# Altium PCB main_Bord.PcbDoc
Units mil, origin at the board's own origin, x right, y up, seen from the top; angles counter-clockwise.
Board outline 6594.49 x 6472.05 mil, 2 copper layers (Top Layer, Bottom Layer), stack 61.855 mil thick; 94 components, 65 nets, 189 pads, 38 vias.
Unrouted connection lines stored in the file: 1.
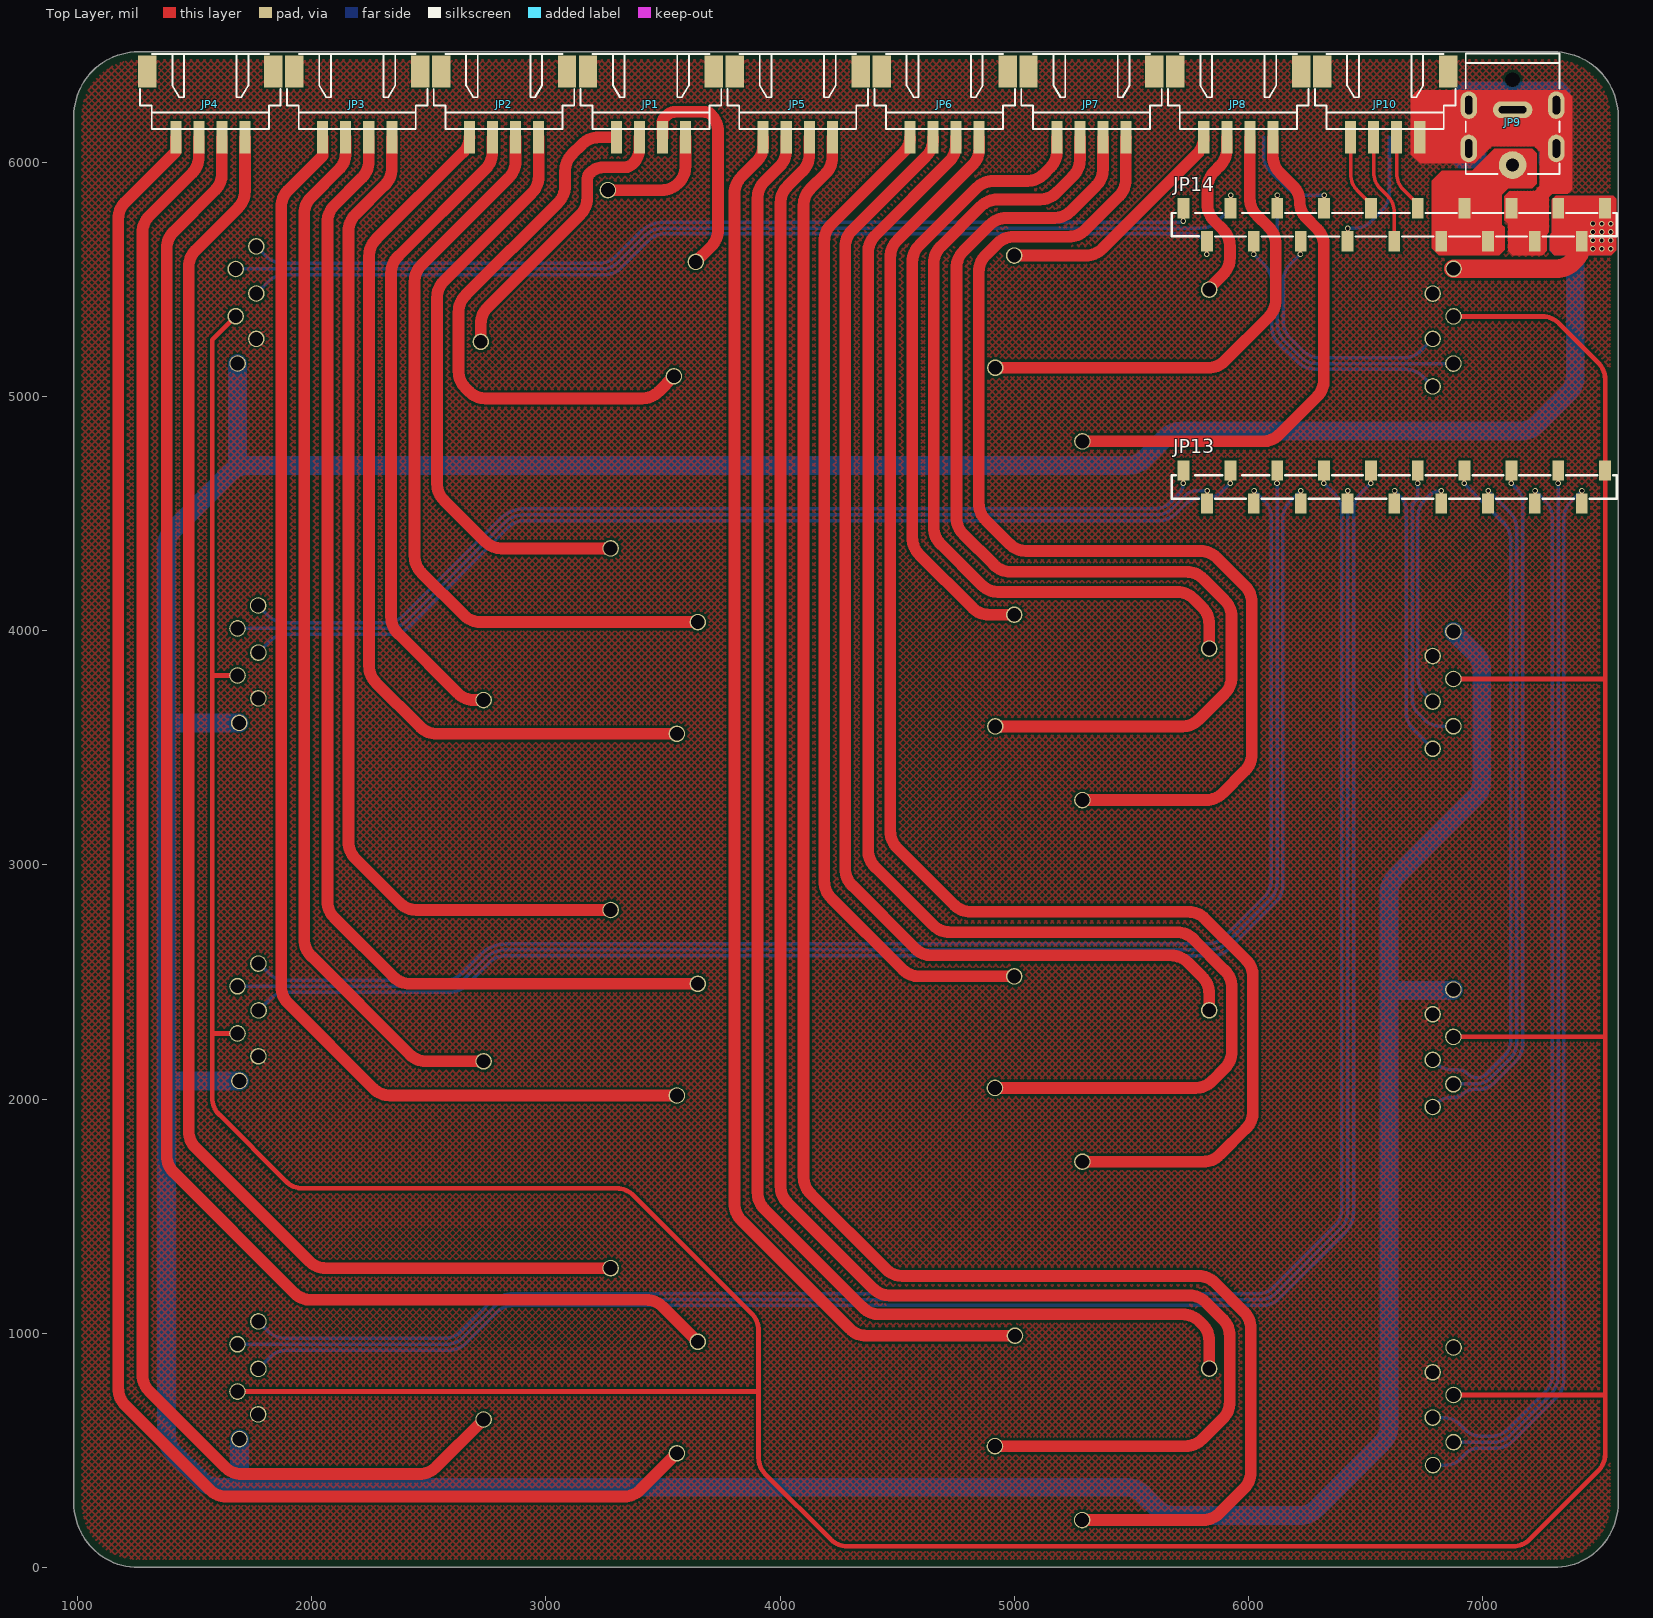
[diagram p0: Top Layer view]
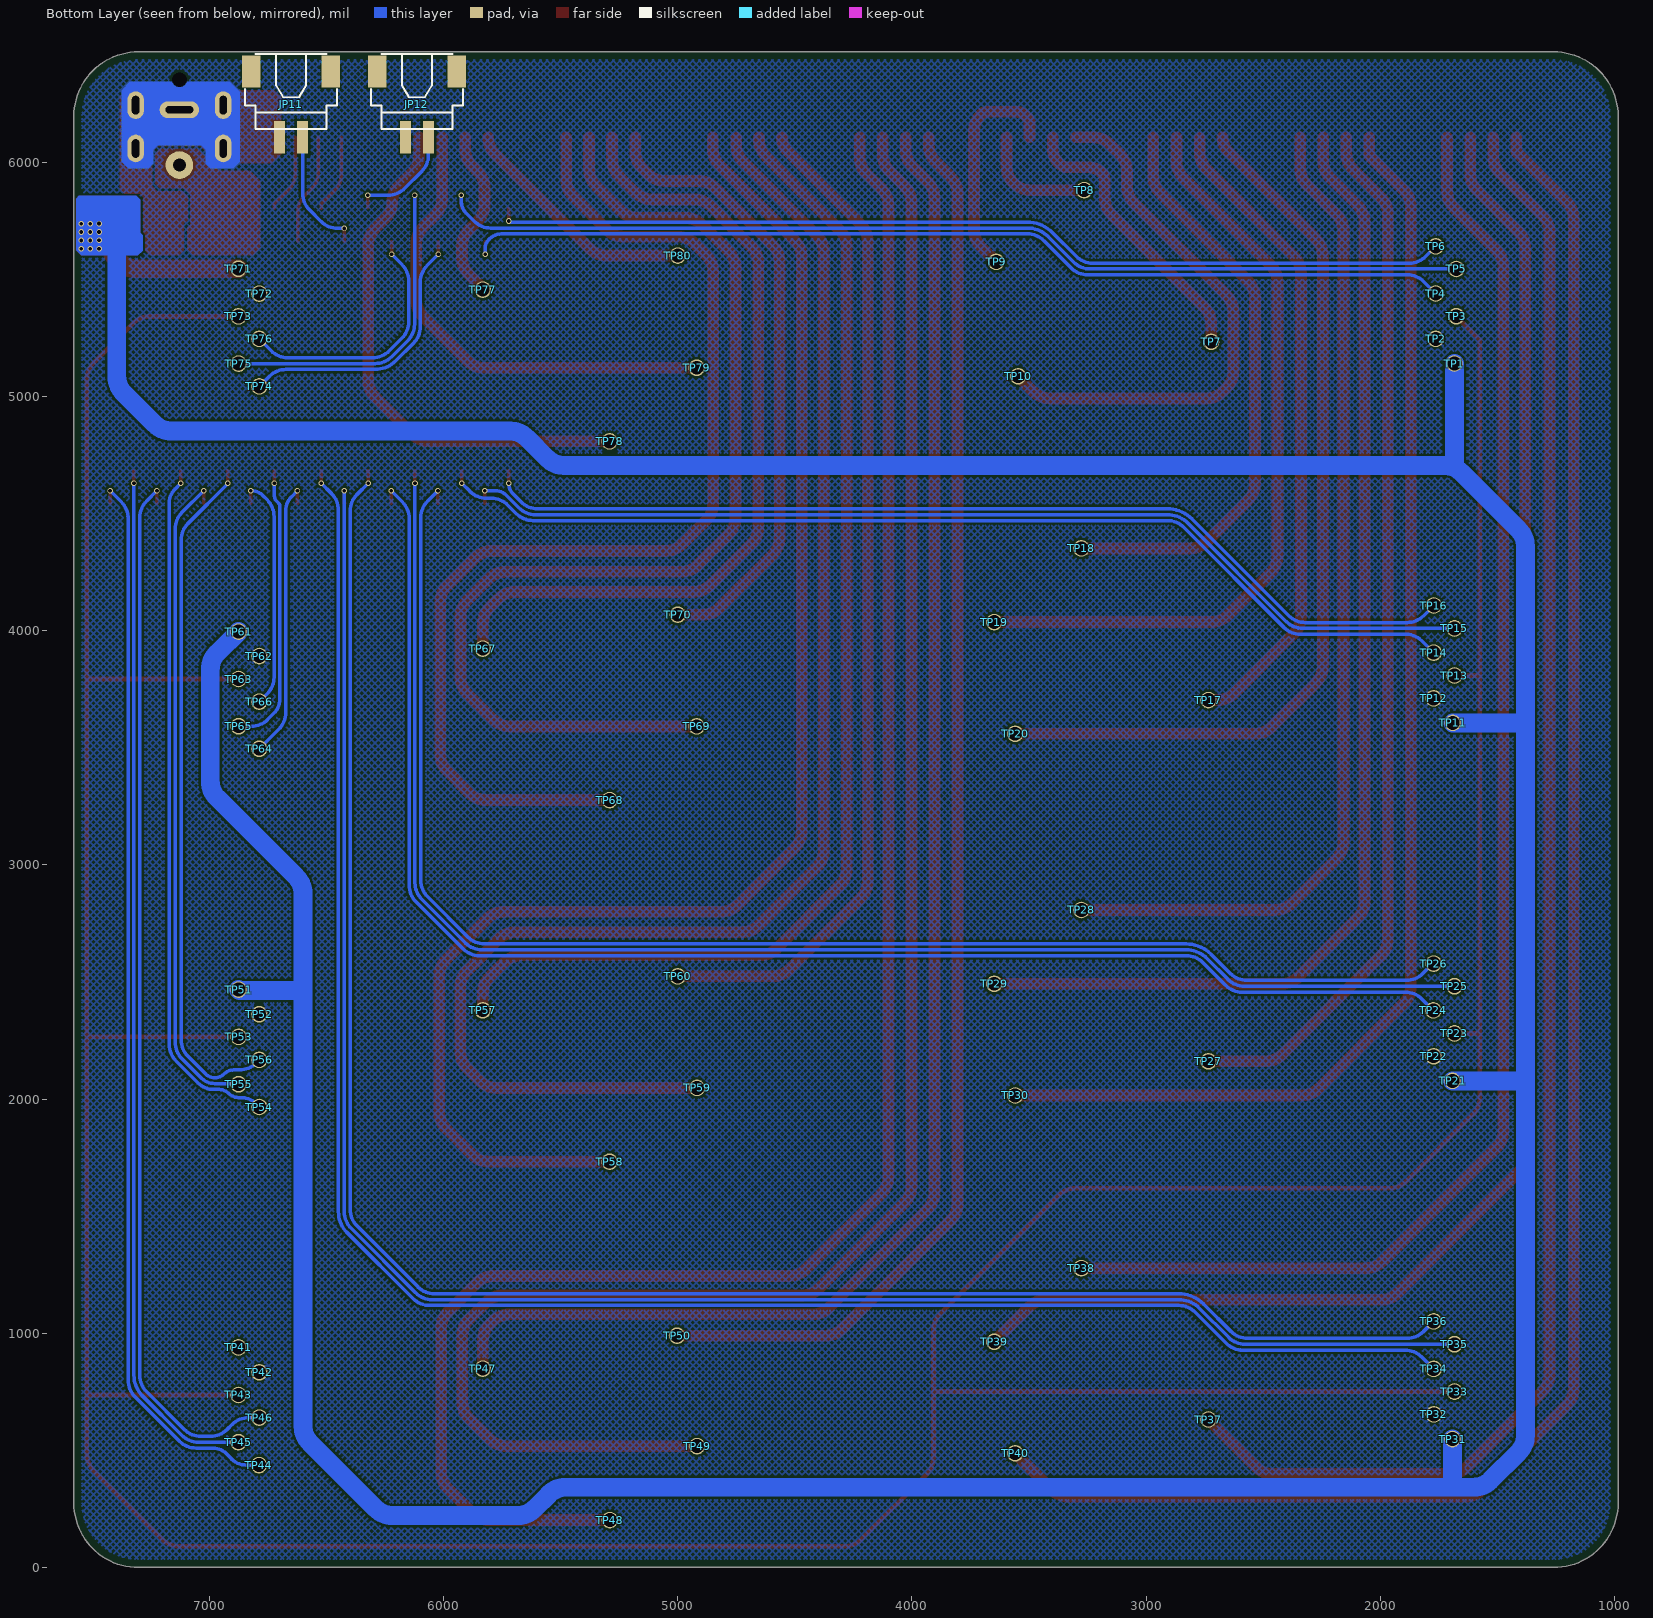
[diagram p1: Bottom Layer view, seen from below]

## Layer stack, top to bottom
Top Solder: solder mask 0.4, Solder Resist, Dk 3.5
Top Layer: signal copper 1.4
Dielectric 1: dielectric 59.0551, FR-4, Dk 4.8
Bottom Layer: signal copper 1.4
Bottom Solder: solder mask 0.4, Solder Resist, Dk 3.5

## Board outline
984.25,275.84 984.25,6196.71 cw(c1259.84,6196.71) 1259.84,6472.3 7303.15,6472.3 cw(c7303.15,6196.71) 7578.74,6196.71 7578.74,275.84 cw(c7303.15,275.84) 7303.15,0.25 1259.84,0.25 cw(c1259.84,275.84)

## Design rules (kind name [scope] priority, off if disabled: settings)
BoardOutlineClearance [All] p1: gap=30 ignorepadtopadclearanceinfootprint=FALSE
Clearance [All] p1: gap=10 ignorepadtopadclearanceinfootprint=FALSE except(0: Arc-Hole Track-Hole SMDPad-Hole THPad-Hole Via-Hole Fill-Hole Poly-Hole Region-Hole Text-Hole)
PolygonConnect [All] p1: connectstyle=Relief reliefconductorwidth=10 reliefentries=4 polygonreliefangle="45 Angle" airgapwidth=6
RoutingVias [All] p1: holewidth=28 width=23.62 viastyle="Through Hole" minholewidth=11.81 minwidth=15.75 maxholewidth=15.75 maxwidth=393.7
SilkToSolderMaskClearance [IsPad] p1: minsilkscreentomaskgap=0 clearancetoexposedcopper=TRUE
SolderMaskExpansion [All] p1: expansion=4 istentingtop=FALSE
Width [All] p1: maxlimit=100 minlimit=8 preferedwidth=10
29 further rules are at their usual default settings.

## Components (designator, comment, footprint, x,y, rotation, side; value= is the part's Value field where it differs from the comment)
JP1 "HDR-1X4" XH2.54-WS-4P 3448.46,6303.35 r180 top
JP2 "HDR-1X4" XH2.54-WS-4P 2821.38,6303.35 r180 top
JP3 "HDR-1X4" XH2.54-WS-4P 2194.3,6303.35 r180 top
JP4 "HDR-1X4" XH2.54-WS-4P 1567.22,6303.35 r180 top
JP5 "HDR-1X4" XH2.54-WS-4P 4075.54,6303.35 r180 top
JP6 "HDR-1X4" XH2.54-WS-4P 4702.62,6303.35 r180 top
JP7 "HDR-1X4" XH2.54-WS-4P 5329.7,6303.35 r180 top
JP8 "HDR-1X4" XH2.54-WS-4P 5956.78,6303.35 r180 top
JP9 "HDR-1X2" DC-005P 7128,6205.36 r180 top
JP10 "HDR-1X4" XH2.54-WS-4P 6583.78,6303.35 r180 top
JP11 "HDR-1X2" XH2.54-WS-2P 6651.2,6303.35 r0 bottom
JP12 "HDR-1X2" XH2.54-WS-2P 6113.65,6303.35 r0 bottom
JP13 "HDR-1X19" 贴片排针2.54mm_交错_19P 7523,4685 r180 top
JP14 "HDR-1X19" 贴片排针2.54mm_交错_19P 7523,5805 r180 top
TP1 "P100_H2" P100_H2 1683.54,5141.43 r180 bottom
TP2 "P100_H2" P100_H2 1763.28,5246.5 r180 bottom
TP3 "P100_H2" P100_H2 1675.25,5343.25 r180 bottom
TP4 "P100_H2" P100_H2 1763.28,5440.36 r180 bottom
TP5 "P100_H2" P100_H2 1675.25,5545.06 r180 bottom
TP6 "P100_H2" P100_H2 1763.28,5641.47 r180 bottom
TP7 "P100_H5" P100_H5 2722.06,5234.18 r180 bottom
TP8 "P100_H5" P100_H5 3264.71,5881.84 r180 bottom
TP9 "P100_H5" P100_H5 3640.22,5575.54 r180 bottom
TP10 "P100_H5" P100_H5 3546.63,5086.83 r90 bottom
TP11 "P100_H2" P100_H2 1690.26,3606.57 r180 bottom
TP12 "P100_H2" P100_H2 1772.14,3711.52 r90 bottom
TP13 "P100_H2" P100_H2 1683.13,3809.12 r90 bottom
TP14 "P100_H2" P100_H2 1772.14,3906.76 r90 bottom
TP15 "P100_H2" P100_H2 1683.13,4010.07 r90 bottom
TP16 "P100_H2" P100_H2 1771.15,4108.03 r90 bottom
TP17 "P100_H5" P100_H5 2733.87,3704.31 r90 bottom
TP18 "P100_H5" P100_H5 3276.53,4351.93 r90 bottom
TP19 "P100_H5" P100_H5 3648.55,4037.27 r90 bottom
TP20 "P100_H5" P100_H5 3559.2,3560.22 r90 bottom
TP21 "P100_H2" P100_H2 1691.42,2077.91 r90 bottom
TP22 "P100_H2" P100_H2 1772.14,2182.97 r90 bottom
TP23 "P100_H2" P100_H2 1683.13,2280.64 r90 bottom
TP24 "P100_H2" P100_H2 1773.26,2378.9 r90 bottom
TP25 "P100_H2" P100_H2 1683.13,2482.14 r90 bottom
TP26 "P100_H2" P100_H2 1772.14,2579.05 r90 bottom
TP27 "P100_H5" P100_H5 2733.87,2161.62 r90 bottom
TP28 "P100_H5" P100_H5 3276.53,2807.84 r90 bottom
TP29 "P100_H5" P100_H5 3648.55,2492.61 r90 bottom
TP30 "P100_H5" P100_H5 3559.2,2015.76 r90 bottom
TP31 "P100_H2" P100_H2 1691.42,548.69 r90 bottom
TP32 "P100_H2" P100_H2 1771.15,654.09 r90 bottom
TP33 "P100_H2" P100_H2 1683.13,751.54 r90 bottom
TP34 "P100_H2" P100_H2 1772.14,848.08 r90 bottom
TP35 "P100_H2" P100_H2 1683.13,953.43 r90 bottom
TP36 "P100_H2" P100_H2 1772.14,1050.87 r90 bottom
TP37 "P100_H5" P100_H5 2733.87,632.1 r90 bottom
TP38 "P100_H5" P100_H5 3276.53,1278.49 r90 bottom
TP39 "P100_H5" P100_H5 3648.55,964.19 r90 bottom
TP40 "P100_H5" P100_H5 3559.2,487.73 r90 bottom
TP41 "P100_H2" P100_H2 6875.88,939.75 r90 bottom
TP42 "P100_H2" P100_H2 6786.85,833.59 r90 bottom
TP43 "P100_H2" P100_H2 6875.88,736.83 r90 bottom
TP44 "P100_H2" P100_H2 6788.19,437.48 r90 bottom
TP45 "P100_H2" P100_H2 6875.88,535.13 r90 bottom
TP46 "P100_H2" P100_H2 6786.85,640.4 r90 bottom
TP47 "P100_H5" P100_H5 5832.35,849.49 r90 bottom
TP48 "P100_H5" P100_H5 5289.73,202.79 r90 bottom
TP49 "P100_H5" P100_H5 4917.61,518.53 r90 bottom
TP50 "P100_H5" P100_H5 5003,990 r90 bottom
TP51 "P100_H2" P100_H2 6875.3,2468.04 r90 bottom
TP52 "P100_H2" P100_H2 6786.85,2362.59 r90 bottom
TP53 "P100_H2" P100_H2 6875.3,2265.93 r90 bottom
TP54 "P100_H2" P100_H2 6786.85,1966.55 r90 bottom
TP55 "P100_H2" P100_H2 6875.3,2063.82 r90 bottom
TP56 "P100_H2" P100_H2 6786.85,2167.62 r90 bottom
TP57 "P100_H5" P100_H5 5832.35,2379.4 r90 bottom
TP58 "P100_H5" P100_H5 5291.05,1733.06 r90 bottom
TP59 "P100_H5" P100_H5 4917.61,2047.98 r90 bottom
TP60 "P100_H5" P100_H5 4999.74,2524.33 r90 bottom
TP61 "P100_H2" P100_H2 6875.3,3996.8 r90 bottom
TP62 "P100_H2" P100_H2 6786.85,3892.3 r90 bottom
TP63 "P100_H2" P100_H2 6875.3,3794.2 r90 bottom
TP64 "P100_H2" P100_H2 6786.85,3496.31 r90 bottom
TP65 "P100_H2" P100_H2 6875.3,3592.37 r90 bottom
TP66 "P100_H2" P100_H2 6786.85,3697.5 r90 bottom
TP67 "P100_H5" P100_H5 5832.35,3924 r90 bottom
TP68 "P100_H5" P100_H5 5291.05,3277.15 r90 bottom
TP69 "P100_H5" P100_H5 4919.16,3591.76 r90 bottom
TP70 "P100_H5" P100_H5 4999.74,4068.76 r90 bottom
TP71 "P100_H2" P100_H2 6875.88,5546.03 r90 bottom
TP72 "P100_H2" P100_H2 6786.85,5440.02 r90 bottom
TP73 "P100_H2" P100_H2 6875.88,5342.52 r90 bottom
TP74 "P100_H2" P100_H2 6786.85,5043.51 r90 bottom
TP75 "P100_H2" P100_H2 6875.3,5141.15 r90 bottom
TP76 "P100_H2" P100_H2 6786.85,5246.46 r90 bottom
TP77 "P100_H5" P100_H5 5832.35,5456.98 r90 bottom
TP78 "P100_H5" P100_H5 5291.05,4808.89 r90 bottom
TP79 "P100_H5" P100_H5 4919.16,5123.35 r90 bottom
TP80 "P100_H5" P100_H5 4999.74,5602.4 r90 bottom

## Footprints (in the part's own frame and the unit in brackets; to place one, negate y for a bottom-side part, rotate by r counter-clockwise, add the part's x,y. Pads: shape width x height; smd on the part's side, far side on the other; paste and mask are expansions set on the pad)
DC-005P [mm] "13mm*10mm*10mm(长*宽*高)"
  oval 1.8x3 hole 0.8 slot 2 at 90 deg unplated: 0(-4.75,3.7) 0(-4.75,-1) 0(4.75,3.7) 0(4.75,-1)
  round 3 hole 1.4 unplated: 1(0,5.5)
  oval 4.3x1.8 hole 0.8 slot 3 at 0 deg unplated: 2(0,-0.5)
  round 0 hole 1.6 unplated: 4(0,-3.75)
  silkscreen extent -5.08,-6.6 5.08,6.48, body extent -5,-6.5 5,6.3, height 10.15
P100_H2 [mm] "P100系列探针H2"
  round 1.8 hole 1.5: 1(0,0)
  body extent -0.75,-0.74 0.75,0.74, height 25
P100_H5 [mm] "P100系列探针H53"
  round 1.8 hole 1.5: 1(0,0)
  body extent -1.2,-1.19 1.2,1.19, height 25
XH2.54-WS-2P [mm] "长：10mm，宽：8mm，高：6.1mm"
  rect 2x3.5 smd: 0(-4.327,-2.15) 0(4.327,-2.15)
  rect 1.2x3.5 smd: 1(-1.25,4.981) 2(1.25,4.981)
  silkscreen extent -5,-4.06 5,4.06, body extent -5,-4 5,6.42, height 6.05
XH2.54-WS-4P [mm] "长：15mm，宽：8mm，高：6.1mm"
  rect 2x3.5 smd: 0(-6.827,-2.15) 0(6.827,-2.15)
  rect 1.2x3.5 smd: 1(-3.75,4.981) 2(-1.25,4.981) 3(1.25,4.981) 4(3.75,4.981)
  silkscreen extent -7.62,-4.06 7.62,4.06, body extent -7.5,-4 7.5,6.42, height 6.05
贴片排针2.54mm_交错_19P [mm] "交错贴片排针"
  rect 1.27x2.2 smd: 1(0,0) 2(2.54,3.6) 3(5.08,0) 4(7.62,3.6) 5(10.16,0) 6(12.7,3.6) 7(15.24,0) 8(17.78,3.6) 9(20.32,0) 10(22.86,3.6) 11(25.4,0) 12(27.94,3.6) 13(30.48,0) 14(33.02,3.6) 15(35.56,0) 16(38.1,3.6) 17(40.64,0) 18(43.18,3.6) 19(45.72,0) ""(35.56,0)
  silkscreen extent -1.27,0.53 46.99,3.07, body extent -1.24,-0.58 39.41,4.22, height 9.16

## Part data
JP1 JP2 JP3 JP4 JP5 JP6 JP7 JP8 JP10: library part "Header 4", "4P接插件", BOM名称=4P接插件, 学习资源=www.ooocke.com, 版权归属=源创客
JP9 JP11 JP12: library part "Header 2", "2P接插件", BOM名称=2P接插件, 学习资源=www.ooocke.com, 版权归属=源创客
JP13 JP14: library part "Header 19", "19P接插件", BOM名称=19P接插件, 学习资源=www.ooocke.com, 版权归属=源创客
TP1 TP2 TP3 TP4 TP5 TP6 TP7 TP8 TP9 TP10 TP11 TP12 TP13 TP14 TP15 TP16 TP17 TP18 TP19 TP20 TP21 TP22 TP23 TP24 TP25 TP26 TP27 TP28 TP29 TP30 TP31 TP32 TP33 TP34 TP35 TP36 TP37 TP38 TP39 TP40 TP41 TP42 TP43 TP44 TP45 TP46 TP47 TP48 TP49 TP50 TP51 TP52 TP53 TP54 TP55 TP56 TP57 TP58 TP59 TP60 TP61 TP62 TP63 TP64 TP65 TP66 TP67 TP68 TP69 TP70 TP71 TP72 TP73 TP74 TP75 TP76 TP77 TP78 TP79 TP80: library part TEST, "测试点", BOM名称=测试点, 学习资源=www.ooocke.com, 版权归属=源创客

## Via types
v1: diameter 23.62, hole 15.75, Top Layer to Bottom Layer, 38 vias

## Nets (pads, with @x,y where several pads share a name; then routed paths per layer and width w, separated by ;. In a path a pad name is that pad's centre, name@x,y a point inside that pad or via, vN(x,y) a via of type N, cw(c..) or ccw(c..) an arc to the next point about the centre after c; other vN are vias at no path point)
Buttom: JP11.1 JP14.12 | length 548.3
  Top Layer w15: JP14.12@6423,5664.52 6424,5665.52 6424,5716.26 v1@6423,5717.26
  Bottom Layer w15: v1(6424,5718.26) 6451.84,5718.26 ccw(c6451.84,5818.26) 6522.55,5747.55 6572.7,5797.7 ccw(c6501.99,5868.41) 6601.99,5868.41 JP11.1
FAN1_ID1_STC: JP14.18 TP4.1 | length 4263.2
  Top Layer w15: v1@5823,5609.26 5822,5610.26 5822,5661 JP14.18@5823,5662
  Bottom Layer w15: TP4.1 1813.7,5490.78 cw(c1884.41,5420.06) 1884.41,5520.06 3249,5520.06 ccw(c3249,5620.06) 3319.71,5549.35 3436.07,5665.71 cw(c3506.78,5595) 3506.78,5695 5753.72,5695 cw(c5753.72,5626.72) 5802,5675 5808.31,5668.69 cw(c5775.24,5635.63) 5822,5635.63 v1(5822,5608.26)
FAN1_ID2_STC: JP14.17 TP5.1 | length 4448.6
  Top Layer w15: JP14.17@5923,5806.26 5924,5807.26 5924,5858 v1@5923,5859
  Bottom Layer w15: TP5.1 3238.64,5545.06 ccw(c3238.64,5645.06) 3309.35,5574.35 3418.42,5683.42 cw(c3506.78,5595) 3506.78,5720 5798.58,5720 ccw(c5798.58,5820) 5869.29,5749.29 5903.76,5783.76 ccw(c5854.89,5832.63) 5924,5832.63 v1(5924,5860)
FAN1_ID3_STC: JP14.19 TP6.1 | length 4100.6
  Top Layer w15: v1@5723,5751 5722,5752 5722,5802.74 JP14.19@5723,5803.74
  Bottom Layer w15: TP6.1 1805.4,5599.35 ccw(c1876.11,5670.06) 1876.11,5570.06 3228.29,5570.06 ccw(c3228.29,5670.06) 3299,5599.35 3400.71,5701.07 cw(c3506.78,5595) 3400.77,5701.13 cw(c3506.78,5595) 3506.78,5745 5709.93,5745 ccw(c5709.93,5762.07) 5715.66,5745.99 ccw(c5709.93,5762.07) v1(5722,5750)
FAN2_ID1_STC: JP13.17 TP14.1 | length 4477.4
  Top Layer w15: v1@5923,4631 5922,4632 5922,4682.74 JP13.17@5923,4683.74
  Bottom Layer w15: TP14.1 1822.69,3957.31 cw(c1889.72,3890.28) 1889.72,3985.07 2340.62,3985.07 ccw(c2340.62,4085.07) 2411.33,4014.36 2838.68,4441.71 cw(c2909.39,4371) 2909.39,4471 5618.29,4471 ccw(c5618.29,4571) 5689,4500.29 5725.42,4536.71 cw(c5796.13,4466) 5796.13,4566 5816.58,4566 ccw(c5816.58,4666) 5887.29,4595.29 v1(5922,4630)
FAN2_ID2_STC: JP13.18 TP15.1 | length 4421.3
  Top Layer w15: JP13.18@5823,4544.52 5824,4545.52 5824,4596.26 v1@5823,4597.26
  Bottom Layer w15: TP15.1 2330.27,4010.07 ccw(c2330.27,4110.07) 2400.98,4039.36 2821.04,4459.42 cw(c2909.39,4371) 2909.39,4496 5607.93,4496 ccw(c5607.93,4596) 5678.64,4525.29 5732.25,4578.9 cw(c5779,4532.15) 5779,4598.26 v1(5824,4598.26)
FAN2_ID3_STC: JP13.19 TP16.1 | length 4274.2
  Top Layer w15: v1@5723,4631 5722,4632 5722,4682.74 JP13.19@5723,4683.74
  Bottom Layer w15: TP16.1 1814.82,4064.36 ccw(c1885.53,4135.07) 1885.53,4035.07 2319.91,4035.07 ccw(c2319.91,4135.07) 2390.62,4064.36 2803.33,4477.07 cw(c2909.39,4371) 2803.39,4477.13 cw(c2909.39,4371) 2909.39,4521 5597.58,4521 ccw(c5597.58,4621) 5668.29,4550.29 5703.62,4585.62 ; 5703.64,4585.64 ccw(c5659.23,4630) v1(5722,4630)
FAN3_ID1_STC: JP13.14 TP24.1 | length 6363.7
  Top Layer w15: JP13.14@6223,4544.52 6224,4545.52 6224,4596.26 v1@6223,4597.26
  Bottom Layer w15: TP24.1 1822.21,2427.85 cw(c1892.92,2357.14) 1892.92,2457.14 2590.07,2457.14 ccw(c2590.07,2557.14) 2660.78,2486.43 2758.07,2583.71 cw(c2828.78,2513) 2828.78,2613 5846.29,2613 ccw(c5846.29,2713) 5917,2642.29 6117.71,2843 ccw(c6047,2913.71) 6147,2913.71 6147,4479.84 cw(c6247,4479.84) 6176.29,4550.55 v1(6224,4598.26)
FAN3_ID2_STC: JP13.15 TP25.1 | length 6387.4
  Top Layer w15: v1@6123,4631 6122,4632 6122,4682.74 JP13.15@6123,4683.74
  Bottom Layer w15: TP25.1 2579.72,2482.14 ccw(c2579.72,2582.14) 2650.43,2511.43 2740.42,2601.42 cw(c2828.78,2513) 2828.78,2638 5835.93,2638 ccw(c5835.93,2738) 5906.64,2667.29 6092.71,2853.36 ccw(c6022,2924.07) 6122,2924.07 v1(6122,4630)
FAN3_ID3_STC: JP13.16 TP26.1 | length 6275.6
  Top Layer w15: JP13.16@6023,4544.52 6024,4545.52 6024,4596.26 v1@6023,4597.26
  Bottom Layer w15: TP26.1 1775.76,2579.05 1818.38,2536.43 ccw(c1889.09,2607.14) 1889.09,2507.14 2569.36,2507.14 ccw(c2569.36,2607.14) 2640.07,2536.43 2722.71,2619.07 cw(c2828.78,2513) 2722.77,2619.13 cw(c2828.78,2513) 2828.78,2663 5825.58,2663 ccw(c5825.58,2763) 5896.29,2692.29 6067.71,2863.71 ccw(c5997,2934.42) 6097,2934.42 6097,4483.84 ccw(c5997,4483.84) 6067.71,4554.55 v1(6024,4598.26)
FAN4_ID1_STC: JP13.11 TP34.1 | length 8153
  Top Layer w15: v1@6523,4631 6522,4632 6522,4682.74 JP13.11@6523,4683.74
  Bottom Layer w15: TP34.1 1823.2,899.14 cw(c1893.91,828.43) 1893.91,928.43 2587.22,928.43 ccw(c2587.22,1028.43) 2657.94,957.72 2789.93,1089.71 cw(c2860.64,1019) 2860.64,1119 6059.29,1119 ccw(c6059.29,1219) 6130,1148.29 6412.42,1430.71 ccw(c6324,1519.07) 6449,1519.07 6449,4515.58 cw(c6549,4515.58) 6478.29,4586.29 v1(6522,4630)
FAN4_ID2_STC: JP13.12 TP35.1 | length 8113.9
  Top Layer w15: JP13.12@6423,4544.52 6424,4545.52 6424,4596.26 v1@6423,4597.26
  Bottom Layer w15: TP35.1 2576.87,953.43 ccw(c2576.87,1053.43) 2647.58,982.72 2772.28,1107.42 cw(c2860.64,1019) 2860.64,1144 6048.93,1144 ccw(c6048.93,1244) 6119.64,1173.29 6394.71,1448.36 ccw(c6324,1519.07) 6424,1519.07 v1(6424,4598.26)
FAN4_ID3_STC: JP13.13 TP36.1 | length 8067.4
  Top Layer w15: v1@6323,4631 6322,4632 6322,4682.74 JP13.13@6323,4683.74
  Bottom Layer w15: TP36.1 1815.29,1007.72 ccw(c1886,1078.43) 1886,978.43 2566.51,978.43 ccw(c2566.51,1078.43) 2637.22,1007.72 2754.57,1125.07 cw(c2860.64,1019) 2754.63,1125.13 cw(c2860.64,1019) 2860.64,1169 6038.58,1169 ccw(c6038.58,1269) 6109.29,1198.29 6369.71,1458.71 ccw(c6299,1529.42) 6399,1529.42 6399,4511.58 ccw(c6299,4511.58) 6369.71,4582.29 v1(6322,4630)
FAN5_ID1_STC: JP13.2 TP44.1 | length 4596.7
  Top Layer w15: JP13.2@7423,4544.52 7424,4545.52 7424,4596.26 v1@7423,4597.26
  Bottom Layer w15: TP44.1 6842,437.48 ccw(c6842,527.38) 6905.54,463.77 ; 6905.57,463.81 6928.73,486.97 cw(c6984.65,431.05) 6984.65,510.13 7057.07,510.13 ccw(c7057.07,610.13) 7127.78,539.42 7317.71,729.36 ccw(c7247,800.07) 7347,800.07 7347,4479.84 cw(c7447,4479.84) 7376.29,4550.55 v1(7424,4598.26)
FAN5_ID2_STC: JP13.3 TP45.1 | length 4447.9
  Top Layer w15: v1@7323,4631 7322,4632 7322,4682.74 JP13.3@7323,4683.74
  Bottom Layer w15: TP45.1 7046.71,535.13 ccw(c7046.71,635.13) 7117.42,564.42 7285.46,732.46 ccw(c7197,820.78) 7322,820.78 v1(7322,4630)
FAN5_ID3_STC: JP13.4 TP46.1 | length 4515.4
  Top Layer w15: JP13.4@7223,4544.52 7224,4545.52 7224,4596.26 v1@7223,4597.26
  Bottom Layer w15: TP46.1 6832.18,640.4 cw(c6832.18,540.4) 6902.89,611.11 6924.58,589.42 ccw(c6995.29,660.13) 6995.29,560.13 7036.53,560.13 ccw(c7036.53,659.7) 7106.94,589.3 7267.71,750.07 ccw(c7197,820.78) 7297,820.78 7297,4483.84 ccw(c7197,4483.84) 7267.71,4554.55 v1(7224,4598.26)
FAN6_ID1_STC: JP13.5 TP54.1 | length 2984.4
  Top Layer w15: v1@7123,4631 7122,4632 7122,4682.74 JP13.5@7123,4683.74
  Bottom Layer w15: TP54.1 6801.6,1981.3 cw(c6863.65,1919.24) 6863.65,2007 ; 6848,2007 6863.65,2007 ; 7048.92,2069.56 cw(c6981,2137.55) 6981,2041.45 6958.81,2041.45 ccw(c6958.81,1982.64) 6917.22,2024.22 cw(c6875.64,2065.81) 6875.64,2007 6863.65,2007 ; 7048.95,2069.6 7141.71,2162.36 ccw(c7071,2233.07) 7171,2233.07 7171,4546.35 ccw(c7087.35,4546.35) 7146.53,4605.47 ; v1(7122,4630) 7146.5,4605.5
FAN6_ID2_STC: JP13.6 TP55.1 | length 2816.2
  Top Layer w15: JP13.6@7023,4544.52 7024,4545.52 7024,4596.26 v1@7023,4597.26
  Bottom Layer w15: TP55.1 6877.93,2066.45 6977,2066.45 6977.45,2066.45 ccw(c6976.55,2148.3) 7032.55,2088.61 7033.5,2089.5 7116.71,2172.71 ccw(c7046,2243.42) 7146,2243.42 7146,4434.84 ccw(c7046,4434.84) 7116.71,4505.55 v1(7024,4598.26)
FAN6_ID3_STC: JP13.7 TP56.1 | length 2948.9
  Top Layer w15: v1@6923,4631 6922,4632 6922,4682.74 JP13.7@6923,4683.74
  Bottom Layer w15: TP56.1 6800.18,2154.29 ccw(c6870.89,2225) 6870.89,2125 6895.73,2125 cw(c6895.73,2067.73) 6936.22,2108.22 6936.35,2108.1 ccw(c6976.55,2148.3) 6976.55,2091.45 ccw(c6976.55,2148.3) 7016.74,2108.1 7091.34,2182.69 ccw(c7020.63,2253.4) 7120.63,2253.4 7120.63,4387.62 ccw(c7020.63,4387.62) 7091.34,4458.33 6922,4627.67 v1(6922,4630)
FAN7_ID1_STC: JP13.10 TP64.1 | length 1215
  Top Layer w15: JP13.10@6623,4544.52 6624,4545.52 6624,4596.26 v1@6623,4597.26
  Bottom Layer w15: v1(6624,4598.26) 6649,4573.26 cw(c6588.64,4512.9) 6649.04,4573.22 cw(c6588.64,4512.9) 6674,4512.9 6674,3650.59 ccw(c6774,3650.59) 6703.29,3579.87 TP64.1
FAN7_ID2_STC: JP13.9 TP65.1 | length 1219.5
  Top Layer w15: v1@6723,4631 6722,4632 6722,4682.74 JP13.9@6723,4683.74
  Bottom Layer w15: 6714.16,4555.16 6706.32,4547.32 ccw(c6724,4529.64) 6699,4529.64 6699,3709.31 ccw(c6786.65,3709.31) 6724.64,3647.36 6750.34,3621.66 ccw(c6821.05,3692.37) 6821.05,3592.37 TP65.1 ; 6714.18,4555.18 ccw(c6695.24,4574.09) 6722,4574.09 v1(6722,4630)
FAN7_ID3_STC: JP13.8 TP66.1 | length 1028.7
  Top Layer w15: JP13.8@6823,4544.52 6824,4545.52 6824,4596.26 v1@6823,4597.26
  Bottom Layer w15: TP66.1 6753.29,3731.06 cw(c6824,3801.77) 6724,3801.77 6724,4488.22 cw(c6824,4488.22) 6753.29,4558.93 6772.95,4578.6 cw(c6820.42,4531.13) 6820.42,4598.26 v1(6824,4598.26)
FAN8_ID1_STC: JP14.16 TP74.1 | length 1194.3
  Top Layer w15: v1@6023,5609.26 6022,5610.26 6022,5661 JP14.16@6023,5662
  Bottom Layer w15: v1(6022,5608.26) 6069.71,5560.55 cw(c5999,5489.84) 6099,5489.84 6099,5299.07 ccw(c6199,5299.07) 6128.29,5228.36 6203.86,5152.78 ccw(c6292.27,5241.15) 6292.27,5116.15 6672.79,5116.15 cw(c6672.79,5016.15) 6743.5,5086.86 TP74.1
FAN8_ID2_STC: JP14.15 TP75.1 | length 1440.8
  Top Layer w15: JP14.15@6123,5806.26 6124,5807.26 6124,5858 v1@6123,5859
  Bottom Layer w15: v1(6124,5860) 6124,5309.42 ccw(c6224,5309.42) 6153.29,5238.71 6221.56,5170.44 ccw(c6292.27,5241.15) 6292.27,5141.15 TP75.1
FAN8_ID3_STC: JP14.14 TP76.1 | length 1114.1
  Top Layer w15: v1@6223,5609.26 6222,5610.26 6222,5661 JP14.14@6223,5662
  Bottom Layer w15: v1(6222,5608.26) 6178.29,5564.55 ccw(c6249,5493.84) 6149,5493.84 6149,5319.78 ccw(c6249,5319.78) 6178.29,5249.07 6231.92,5195.44 ccw(c6302.63,5266.15) 6302.63,5166.15 6665.12,5166.15 ccw(c6665.12,5266.15) 6735.83,5195.44 TP76.1
GND: JP1.0 JP2.0 JP3.0 JP4.0 JP5.0 JP6.0 JP7.0 JP8.0 JP9.0 JP9.2 JP10.0 JP10.1 JP11.0 JP11.2 JP12.0 JP12.2 JP14.4 JP14.5 TP2.1 TP12.1 TP22.1 TP32.1 TP42.1 TP52.1 TP62.1 TP72.1
LIN: JP13.1 TP3.1 TP13.1 TP23.1 TP33.1 TP43.1 TP53.1 TP63.1 TP73.1 | length 20421.1
  Top Layer w20: TP3.1 1575,5243 1575,3806 ; TP33.1 3907.54,751.54 3908,752 ; TP23.1 1579.64,2280.64 1575,2276 ; TP13.1 1578.12,3809.12 1575,3806 ; TP53.1 7521.93,2265.93 7523,2267 ; TP63.1 7516.2,3794.2 7523,3801 ; TP43.1 7519.17,736.83 7523,733 ; TP73.1 7255.06,5342.52 cw(c7255.06,5242.52) 7325.77,5313.23 7493.71,5145.29 cw(c7423,5074.58) 7523,5074.58 JP13.1 7523,3801 ; 1575,2276 1575,2005.42 ccw(c1675,2005.42) 1604.29,1934.71 1890.71,1648.29 ccw(c1961.42,1719) 1961.42,1619 3302.58,1619 cw(c3302.58,1519) 3373.29,1589.71 3878.71,1084.29 cw(c3808,1013.58) 3908,1013.58 3908,752 ; 1575,2276 1575,3806 ; 3908,752 3908,469.42 ccw(c4008,469.42) 3937.29,398.71 4215.71,120.29 ccw(c4286.42,191) 4286.42,91 7130.58,91 ccw(c7130.58,191) 7201.29,120.29 7493.71,412.71 ccw(c7423,483.42) 7523,483.42 7523,733 ; 7523,733 7523,2267 ; 7523,2267 7523,3801
PART1_CMP: JP1.3 TP7.1 | length 1217.5
  Top Layer w50: TP7.1 2722.06,5310.64 cw(c2822.06,5310.64) 2751.35,5381.35 3146.71,5776.71 ccw(c3076,5847.42) 3176,5847.42 3176,5920 cw(c3247.73,5920) 3181.25,5946.93 3191.63,5957.31 cw(c3244,5904.93) 3244,5979 3333.37,5979 ccw(c3333.37,6033.63) 3372,5995 ccw(c3306.22,6060.78) 3399.25,6060.78 JP1.3
PART1_U: JP1.1 TP8.1 | length 513
  Top Layer w50: TP8.1 3494.61,5881.84 ccw(c3494.61,5981.84) 3565.32,5911.13 3566.81,5912.61 ccw(c3496.1,5983.32) 3596.1,5983.32 JP1.1
PART1_V: JP1.2 TP9.1 | length 968.5
  Top Layer w50: JP1.2 3497.67,6169.48 cw(c3529.52,6169.48) 3507,6192 3515.45,6200.45 cw(c3553,6162.89) 3553,6216 3671,6216 cw(c3671,6132.2) 3698.46,6211.37 3705.71,6204.12 cw(c3635,6133.41) 3735,6133.41 3735,5711.74 cw(c3635,5711.74) 3705.71,5641.03 TP9.1
PART1_W: JP1.4 TP10.1 | length 2347.5
  Top Layer w50: JP1.4 3225.67,6107.25 ccw(c3225.67,6007.25) 3154.96,6077.96 3111.29,6034.29 ccw(c3182,5963.58) 3082,5963.58 3082,5899.42 cw(c2982,5899.42) 3052.71,5828.71 2656.29,5432.29 ccw(c2727,5361.58) 2627,5361.58 2627,5108.42 ccw(c2727,5108.42) 2656.29,5037.71 2672.71,5021.29 ccw(c2743.42,5092) 2743.42,4992 3410.38,4992 ccw(c3410.38,5092) 3481.09,5021.29 TP10.1
PART2_CMP: JP2.3 TP17.1 | length 2774.4
  Top Layer w50: TP17.1 2693.28,3704.31 cw(c2693.28,3802.3) 2623.99,3733.01 2368.29,3988.71 cw(c2439,4059.42) 2339,4059.42 2339,5527.58 cw(c2439,5527.58) 2368.29,5598.29 2741.5,5971.5 ccw(c2670.79,6042.21) 2770.79,6042.21 JP2.3@2770.79,6105.87
PART2_U: JP2.1 TP18.1 | length 2521.7
  Top Layer w50: JP2.1 2969.02,5939.44 cw(c2869.02,5939.44) 2939.73,5868.73 2564.29,5493.29 ccw(c2635,5422.58) 2535,5422.58 2535,4628.42 ccw(c2635,4628.42) 2564.29,4557.71 2740.78,4381.22 ccw(c2811.49,4451.93) 2811.49,4351.93 TP18.1
PART2_V: JP2.2 TP19.1 | length 3300.1
  Top Layer w50: JP2.2 2870.59,6005.01 cw(c2770.59,6005.01) 2841.3,5934.3 2468.29,5561.29 ccw(c2539,5490.58) 2439,5490.58 2439,4319.42 ccw(c2539,4319.42) 2468.29,4248.71 2650.44,4066.56 ccw(c2721.15,4137.27) 2721.15,4037.27 TP19.1
PART2_W: JP2.4 TP20.1 | length 3877
  Top Layer w50: JP2.4 cw(c2585.28,6107.25) 2647.83,6044.7 2274.29,5671.15 ccw(c2345,5600.44) 2245,5600.44 2245,3849.42 ccw(c2345,3849.42) 2274.29,3778.71 2463.49,3589.51 ccw(c2534.2,3660.22) 2534.2,3560.22 TP20.1
PART3_CMP: JP3.3 TP27.1 | length 4486.8
  Top Layer w50: JP3.3 2145.09,6040.51 cw(c2045.09,6040.51) 2115.8,5969.8 1997.29,5851.29 ccw(c2068,5780.58) 1968,5780.58 1968,2682.42 ccw(c2068,2682.42) 1997.29,2611.71 2418.09,2190.91 ccw(c2488.8,2261.62) 2488.8,2161.62 TP27.1
PART3_U: JP3.1 TP28.1 | length 4332.4
  Top Layer w50: JP3.1 2341.94,5974.36 cw(c2241.94,5974.36) 2312.65,5903.65 2186.29,5777.29 ccw(c2257,5706.58) 2157,5706.58 2157,3098.42 ccw(c2257,3098.42) 2186.29,3027.71 2376.87,2837.13 ccw(c2447.58,2907.84) 2447.58,2807.84 TP28.1
PART3_V: JP3.2 TP29.1 | length 5069.7
  Top Layer w50: JP3.2 2243.51,6004.78 cw(c2143.51,6004.78) 2214.22,5934.06 2096.29,5816.13 ccw(c2167,5745.42) 2067,5745.42 2067,2845.42 ccw(c2167,2845.42) 2096.29,2774.71 2349.1,2521.9 ccw(c2419.81,2592.61) 2419.81,2492.61 TP29.1
PART3_W: JP3.4 TP30.1 | length 5593
  Top Layer w50: JP3.4 2046.66,6028.66 1899.29,5881.29 ccw(c1970,5810.58) 1870,5810.58 1870,2480.42 ccw(c1970,2480.42) 1899.29,2409.71 2263.95,2045.05 ccw(c2334.66,2115.76) 2334.66,2015.76 TP30.1
PART4_CMP: JP4.3 TP37.1 | length 7115.6
  Top Layer w50: JP4.3 1518.01,6024.43 cw(c1418.01,6024.43) 1488.72,5953.72 1306.29,5771.29 ccw(c1377,5700.58) 1277,5700.58 1277,823.42 ccw(c1377,823.42) 1306.29,752.71 1630.71,428.29 ccw(c1701.42,499) 1701.42,399 2459.34,399 ccw(c2459.34,499) 2530.05,428.29 TP37.1
PART4_U: JP4.1 TP38.1 | length 6394
  Top Layer w50: JP4.1 1714.86,5877.28 cw(c1614.86,5877.28) 1685.57,5806.57 1504.29,5625.29 ccw(c1575,5554.58) 1475,5554.58 1475,1863.42 ccw(c1575,1863.42) 1504.29,1792.71 1989.22,1307.78 ccw(c2059.93,1378.49) 2059.93,1278.49 TP38.1
PART4_V: JP4.2 TP39.1 | length 7045.6
  Top Layer w50: JP4.2 1616.43,5951.85 cw(c1516.43,5951.85) 1587.14,5881.14 1410.29,5704.29 ccw(c1481,5633.58) 1381,5633.58 1381,1758.42 ccw(c1481,1758.42) 1410.29,1687.71 1925.71,1172.29 ccw(c1996.42,1243) 1996.42,1143 3428.32,1143 cw(c3428.32,1043) 3499.03,1113.71 TP39.1
PART4_W: JP4.4 TP40.1 | length 8104.5
  Top Layer w50: JP4.4 1419.58,6046.58 1203.29,5830.29 ccw(c1274,5759.58) 1174,5759.58 1174,764.42 ccw(c1274,764.42) 1203.29,693.71 1564.71,332.29 ccw(c1635.42,403) 1635.42,303 3333.05,303 ccw(c3333.05,403) 3403.76,332.29 TP40.1
PART5_CMP: JP5.3 TP47.1 | length 6888.9
  Top Layer w50: JP5.3 4026.33,6052.75 cw(c3926.33,6052.75) 3997.04,5982.04 3932.88,5917.88 ccw(c4003.6,5847.17) 3903.6,5847.17 3903.6,1601.83 ccw(c4003.6,1601.83) 3932.88,1531.12 4353.71,1110.29 ccw(c4424.42,1181) 4424.42,1081 5719.58,1081 cw(c5719.58,981) 5790.29,1051.71 5803.06,1038.94 cw(c5732.35,968.23) 5832.35,968.23 TP47.1
PART5_U: JP5.1 TP48.1 | length 8125
  Top Layer w50: JP5.1 4223.18,6022.6 cw(c4123.18,6022.6) 4193.89,5951.89 4129.73,5887.73 ccw(c4200.45,5817.02) 4100.45,5817.02 4100.45,1667.98 ccw(c4200.45,1667.98) 4129.73,1597.27 4452.71,1274.29 ccw(c4523.42,1345) 4523.42,1245 5786.58,1245 cw(c5786.58,1145) 5857.29,1215.71 5980.71,1092.29 cw(c5910,1021.58) 6010,1021.58 6010,407.42 cw(c5910,407.42) 5980.71,336.71 5876.08,232.08 cw(c5805.36,302.79) 5805.36,202.79 TP48.1
PART5_V: JP5.2 TP49.1 | length 8114
  Top Layer w50: JP5.2 4124.75,6033.17 cw(c4024.75,6033.17) 4095.46,5962.46 4031.31,5898.31 ccw(c4102.02,5827.6) 4002.02,5827.6 4002.02,1628.4 ccw(c4102.02,1628.4) 4031.31,1557.69 4397.71,1191.29 ccw(c4468.42,1262) 4468.42,1162 5747.58,1162 cw(c5747.58,1062) 5818.29,1132.71 5890.71,1060.29 cw(c5820,989.58) 5920,989.58 5920,706.42 cw(c5820,706.42) 5890.71,635.71 5802.82,547.82 cw(c5732.11,618.53) 5732.11,518.53 TP49.1
PART5_W: JP5.4 TP50.1 | length 6043
  Top Layer w50: JP5.4 3927.9,6073.32 cw(c3827.9,6073.32) 3898.61,6002.61 3834.46,5938.46 ccw(c3905.17,5867.75) 3805.17,5867.75 3805.17,1553.25 ccw(c3905.17,1553.25) 3834.46,1482.54 4297.71,1019.29 ccw(c4368.42,1090) 4368.42,990 TP50.1
PART6_CMP: JP6.3 TP57.1 | length 5148.7
  Top Layer w50: JP6.3 4653.41,6097.83 cw(c4553.41,6097.83) 4624.12,6027.12 4307.29,5710.29 ccw(c4378,5639.58) 4278,5639.58 4278,2983.42 ccw(c4378,2983.42) 4307.29,2912.71 4576.71,2643.29 ccw(c4647.42,2714) 4647.42,2614 5669.58,2614 cw(c5669.58,2514) 5740.29,2584.71 5803.06,2521.94 cw(c5732.35,2451.23) 5832.35,2451.23 TP57.1
PART6_U: JP6.1 TP58.1 | length 6358.7
  Top Layer w50: JP6.1 4850.26,6058.68 cw(c4750.26,6058.68) 4820.97,5987.97 4500.29,5667.29 ccw(c4571,5596.58) 4471,5596.58 4471,3143.42 ccw(c4571,3143.42) 4500.29,3072.71 4743.71,2829.29 ccw(c4814.42,2900) 4814.42,2800 5743.58,2800 cw(c5743.58,2700) 5814.29,2770.71 5989.71,2595.29 cw(c5919,2524.58) 6019,2524.58 6019,1945.42 cw(c5919,1945.42) 5989.71,1874.71 5877.35,1762.35 cw(c5806.63,1833.06) 5806.63,1733.06 TP58.1
PART6_V: JP6.2 TP59.1 | length 6382.7
  Top Layer w50: JP6.2@4750.45,6105.87 4750.45,6073.88 cw(c4650.45,6073.88) 4721.16,6003.16 4405.29,5687.29 ccw(c4476,5616.58) 4376,5616.58 4376,3062.42 ccw(c4476,3062.42) 4405.29,2991.71 4654.71,2742.29 ccw(c4725.42,2813) 4725.42,2713 5694.58,2713 cw(c5694.58,2613) 5765.29,2683.71 5899.71,2549.29 cw(c5829,2478.58) 5929,2478.58 5929,2203.42 cw(c5829,2203.42) 5899.71,2132.71 5844.27,2077.27 cw(c5773.56,2147.98) 5773.56,2047.98 TP59.1
PART6_W: JP6.4 TP60.1 | length 4315.6
  Top Layer w50: JP6.4 cw(c4469.22,6107.25) 4529.86,6046.61 4218.29,5735.04 ccw(c4289,5664.32) 4189,5664.32 4189,2929.42 ccw(c4289,2929.42) 4218.29,2858.71 4523.38,2553.62 ccw(c4594.09,2624.33) 4594.09,2524.33 TP60.1
PART7_CMP: JP7.3 TP67.1 | length 3545.6
  Top Layer w50: JP7.3 5280.49,6012.91 cw(c5180.49,6012.91) 5251.2,5942.2 5180.29,5871.29 cw(c5109.58,5942) 5109.58,5842 4928.42,5842 ccw(c4928.42,5742) 4857.71,5812.71 4685.29,5640.29 ccw(c4756,5569.58) 4656,5569.58 4656,4441.42 ccw(c4756,4441.42) 4685.29,4370.71 4860.71,4195.29 ccw(c4931.42,4266) 4931.42,4166 5695.58,4166 cw(c5695.58,4066) 5766.29,4136.71 5803.06,4099.94 cw(c5732.35,4029.23) 5832.35,4029.23 TP67.1
PART7_U: JP7.1 TP68.1 | length 4832.5
  Top Layer w50: TP68.1 5818.73,3277.15 ccw(c5818.73,3377.15) 5889.44,3306.44 5984.71,3401.71 ccw(c5914,3472.42) 6014,3472.42 6014,4121.58 ccw(c5914,4121.58) 5984.71,4192.29 5865.29,4311.71 ccw(c5794.58,4241) 5794.58,4341 5051.42,4341 cw(c5051.42,4441) 4980.71,4370.29 4878.02,4472.98 cw(c4948.73,4543.69) 4848.73,4543.69 4848.73,5533.31 cw(c4948.73,5533.31) 4878.02,5604.02 4927.71,5653.71 cw(c4998.42,5583) 4998.42,5683 5232.58,5683 ccw(c5232.58,5783) 5303.29,5712.29 5446.67,5855.67 ccw(c5375.96,5926.38) 5475.96,5926.38 5475.96,6105.87 JP7.1
PART7_V: JP7.2 TP69.1 | length 4784.8
  Top Layer w50: TP69.1 5717.34,3591.76 ccw(c5717.34,3691.76) 5788.05,3621.05 5898.71,3731.71 ccw(c5828,3802.42) 5928,3802.42 5928,4059.58 ccw(c5828,4059.58) 5898.71,4130.29 5806.29,4222.71 ccw(c5735.58,4152) 5735.58,4252 4984.42,4252 cw(c4984.42,4352) 4913.71,4281.29 4782.29,4412.71 cw(c4853,4483.42) 4753,4483.42 4753,5549.58 cw(c4853,5549.58) 4782.29,5620.29 4895.71,5733.71 cw(c4966.42,5663) 4966.42,5763 5170.58,5763 ccw(c5170.58,5863) 5241.29,5792.29 5349.62,5900.62 ccw(c5278.91,5971.33) 5378.91,5971.33 JP7.2
PART7_W: JP7.4 TP70.1 | length 2668.9
  Top Layer w50: TP70.1 4892.66,4068.76 cw(c4892.66,4168.76) 4821.95,4098.05 4594.29,4325.71 cw(c4665,4396.42) 4565,4396.42 4565,5575.58 cw(c4665,5575.58) 4594.29,5646.29 4839.71,5891.71 cw(c4910.42,5821) 4910.42,5921 5055.58,5921 ccw(c5055.58,6021) 5126.29,5950.29 5152.77,5976.77 ccw(c5082.06,6047.48) 5182.06,6047.48 JP7.4
PART8_CMP: JP8.3 TP77.1 | length 739.7
  Top Layer w50: TP77.1 5832.35,5462.62 5891.71,5521.98 ccw(c5821,5592.69) 5921,5592.69 5921,5641.64 ccw(c5821,5641.64) 5891.71,5712.35 5854.03,5750.03 cw(c5924.74,5820.74) 5824.74,5820.74 5824.74,5890.32 cw(c5924.74,5890.32) 5854.03,5961.03 5878.28,5985.28 ccw(c5807.57,6055.99) 5907.57,6055.99 JP8.3
PART8_U: JP8.1 TP78.1 | length 2265
  Top Layer w50: TP78.1 6060.47,4808.89 ccw(c6060.47,4908.89) 6131.18,4838.18 6292.71,4999.71 ccw(c6222,5070.42) 6322,5070.42 6322,5646.77 ccw(c6222,5646.77) 6292.71,5717.48 6247.22,5762.98 cw(c6315.33,5831.1) 6219,5831.1 ccw(c6122.67,5831.1) 6190.78,5899.22 6133.71,5956.29 cw(c6204.42,6027) 6104.42,6027 JP8.1
PART8_V: JP8.2 TP79.1 | length 2065.4
  Top Layer w50: TP79.1 5827.93,5123.35 ccw(c5827.93,5223.35) 5898.64,5152.64 6087.71,5341.71 ccw(c6017,5412.42) 6117,5412.42 6117,5651.77 ccw(c6017,5651.77) 6087.71,5722.48 6035.28,5774.91 cw(c6105.99,5845.63) 6005.99,5845.63 JP8.2
PART8_W: JP8.4 TP80.1 | length 1034.8
  Top Layer w50: TP80.1 5305.39,5602.4 ccw(c5305.39,5702.4) 5376.1,5631.69 5779.85,6035.44 ccw(c5709.14,6106.15) 5809.14,6106.15 JP8.4
Power_ON: JP12.1 JP14.13 | length 475.3
  Top Layer w15: JP14.13@6323,5806.26 6324,5807.26 6324,5858 v1@6323,5859
  Bottom Layer w15: JP12.1 6064.43,6031.99 ccw(c6164.43,6031.99) 6093.72,5961.28 6165.71,5889.29 ccw(c6236.42,5960) 6236.42,5860 v1(6324,5860)
UART_RX: JP10.3 JP14.10 | length 472
  Top Layer w15: JP10.3 6534.57,5958.1 ccw(c6634.57,5958.1) 6563.86,5887.39 6593.71,5857.53 cw(c6523,5786.82) 6623,5786.82 JP14.10
UART_TX: JP10.2 JP14.9 | length 335.7
  Top Layer w15: JP10.2 6632.99,5953.99 ccw(c6732.99,5953.99) 6662.28,5883.28 6704.76,5840.81 6705.5,5840.81 6723,5823.31 JP14.9
VCC5V: JP10.4 JP14.11 | length 334.7
  Top Layer w15: JP10.4 6436.14,5950.28 ccw(c6536.14,5950.28) 6465.43,5879.57 6504.19,5840.81 6505.5,5840.81 6523,5823.31 JP14.11
VCC12V: JP14.1 JP14.2 JP14.3 TP1.1 TP11.1 TP21.1 TP31.1 TP41.1 TP51.1 TP61.1 TP71.1 | length 22073.3
  Top Layer w80: TP71.1 7313.61,5546.03 ccw(c7313.61,5646.03) 7384.32,5575.32 7393.71,5584.71 ccw(c7323,5655.42) 7423,5655.42 JP14.2
  Bottom Layer w80: TP1.1 1683.54,4706 1724.97,4706 ; TP11.1 1400.57,3606.57 1380,3586 ; TP31.1 1691.42,346.58 1695,343 ; TP21.1 1384.91,2077.91 1380,2073 ; TP51.1 6871.26,2464 6600,2464 ; TP61.1 6966.71,3905.39 cw(c6896,3834.68) 6996,3834.68 6996,3357.42 cw(c6896,3357.42) 6966.71,3286.71 6629.29,2949.29 ccw(c6700,2878.58) 6600,2878.58 6600,2464 ; 7395,5677.44 7395,5085.11 cw(c7295,5085.11) 7365.71,5014.4 7233.6,4882.29 cw(c7162.89,4953) 7162.89,4853 5715.42,4853 ccw(c5715.42,4753) 5644.71,4823.71 5556.29,4735.29 cw(c5485.58,4806) 5485.58,4706 1724.97,4706 ; 1380,2073 1380,563.42 ccw(c1480,563.42) 1409.29,492.71 1529.71,372.29 ccw(c1600.42,443) 1600.42,343 1695,343 ; 1380,2073 1380,3586 ; 1380,3586 1380,4361.03 cw(c1480,4361.03) 1409.29,4431.75 1654.25,4676.71 cw(c1724.97,4606) 1724.97,4706 ; 1695,343 5478.58,343 cw(c5478.58,243) 5549.29,313.71 5611.71,251.29 ccw(c5682.42,322) 5682.42,222 6218.58,222 ccw(c6218.58,322) 6289.29,251.29 6570.71,532.71 ccw(c6500,603.42) 6600,603.42 6600,2464
  other v1: 7471,5632 7509,5632 7547,5632 7509,5667 7547,5667 7471,5668 7471,5703 7509,5703 7547,5703 7509,5738 7547,5738 7471,5739
VIN: JP9.1 JP14.6 JP14.7 JP14.8
pads on no net: JP9.4 JP13. JP14.

## Polygon pours and split planes (outlines as drawn)
GND on Bottom Layer "GND_L02_P001" (hatched 45Degree grid 20 track 8, remove dead copper, pour order 1): 984.25,275.84 984.25,6196.71 cw(c1259.84,6196.71) 1259.84,6472.3 7303.15,6472.3 cw(c7303.15,6196.71) 7578.74,6196.71 7578.74,275.84 cw(c7303.15,275.84) 7303.15,0.25 1259.84,0.25 cw(c1259.84,275.84)
GND on Top Layer "GND_L01_P000" (hatched 45Degree grid 20 track 8, remove dead copper, pour order 0): 984.25,275.84 984.25,6196.71 cw(c1259.84,6196.71) 1259.84,6472.3 7303.15,6472.3 cw(c7303.15,6196.71) 7578.74,6196.71 7578.74,275.84 cw(c7303.15,275.84) 7303.15,0.25 1259.84,0.25 cw(c1259.84,275.84)

## Other copper
Top Layer:
  region net VCC12V: 7313.16,5857.06 7296.16,5840.06 7296.16,5700.06 7286.16,5690.06 7286.16,5624.06 7306.16,5604.06 7549.16,5604.06 7570.16,5625.06 7570.16,5845.06 7558.16,5857.06
  region net GND: 6694,6036 6733,5997 6967,5997 7040,6070 7220,6070 7245,6045 7245,5900 7222,5877 7114,5877 7093,5856 7093,5754 7109,5738 7109,5623 7128,5604 7255,5604 7273,5622 7273,5692 7283,5702 7283,5851 7298,5866 7363,5866 7382,5885 7382,6282 7356,6308 6724,6308 6694,6278
  region net VIN: 6783,5633 6812,5604 7071,5604 7094,5627 7094,5723 7082,5735 7082,5862 7110,5890 7211,5890 7231,5910 7231,6039 7212,6058 7050,6058 6956,5964 6826,5964 6783,5921
Bottom Layer:
  region net GND: 7340,6344 7375,6309 7375,6004 7347,5976 7259,5976 7239,5996 7239,6054 7220,6073 7034,6073 7015,6054 7015,5995 6996,5976 6899,5976 6871,6004 6871,6302 6913,6344
  region net VCC12V: 7312,5857 7295,5840 7295,5700 7285,5690 7285,5624 7305,5604 7548,5604 7569,5625 7569,5845 7557,5857
  region net VCC12V: 7312,5857 7295,5840 7295,5700 7285,5690 7285,5624 7305,5604 7548,5604 7569,5625 7569,5845 7557,5857

## Silkscreen, mask and mechanical layers (free items; w line width, h text height)
Mechanical 1:
  the board outline again, w0.5